# Altium PCB BLE_tag_hv1.PcbDoc
Units mm, origin at the board's own origin, x right, y up, seen from the top; angles counter-clockwise.
Board outline 48 x 58 mm, 2 copper layers (Top Layer, Bottom Layer); 40 components, 30 nets, 135 pads, 264 vias.
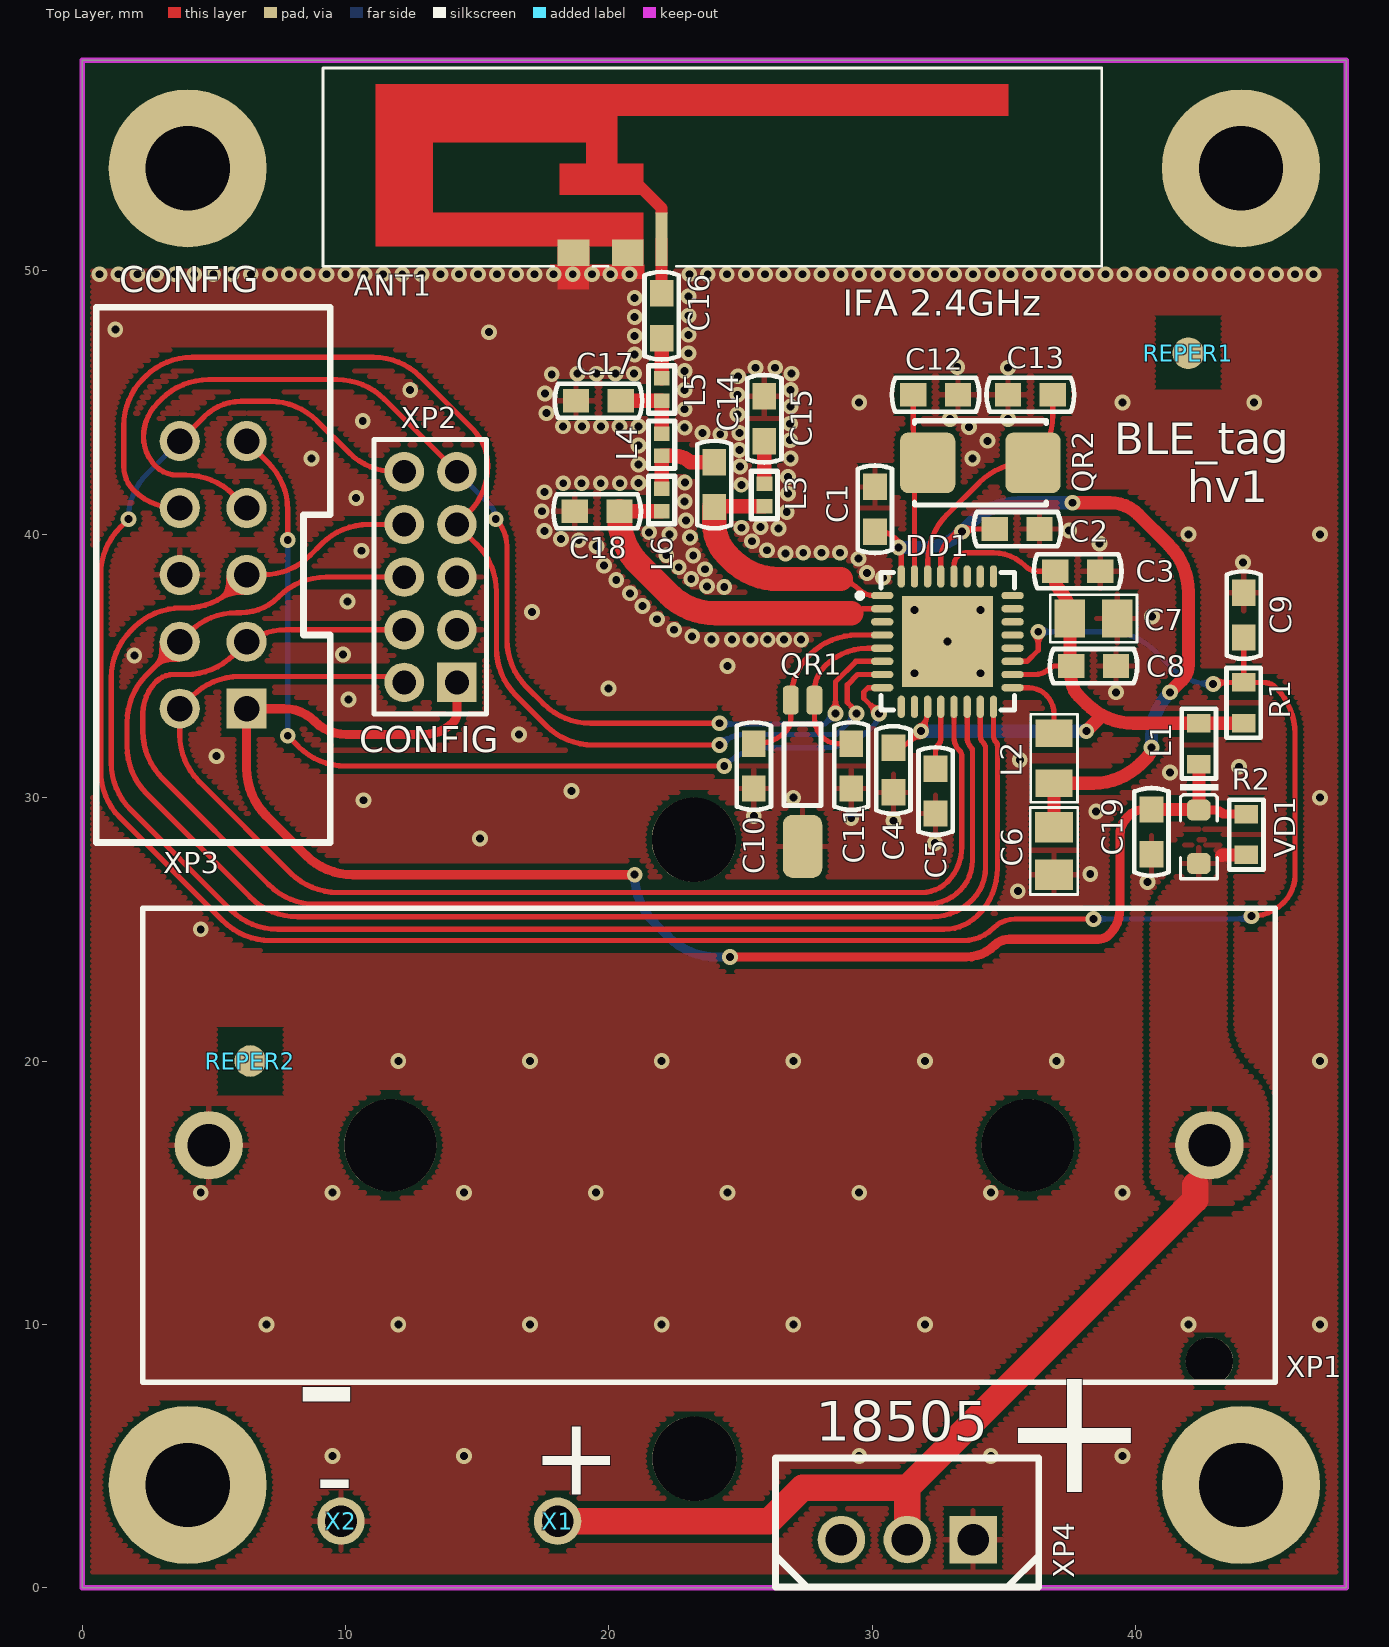
[diagram p0: Top Layer view]
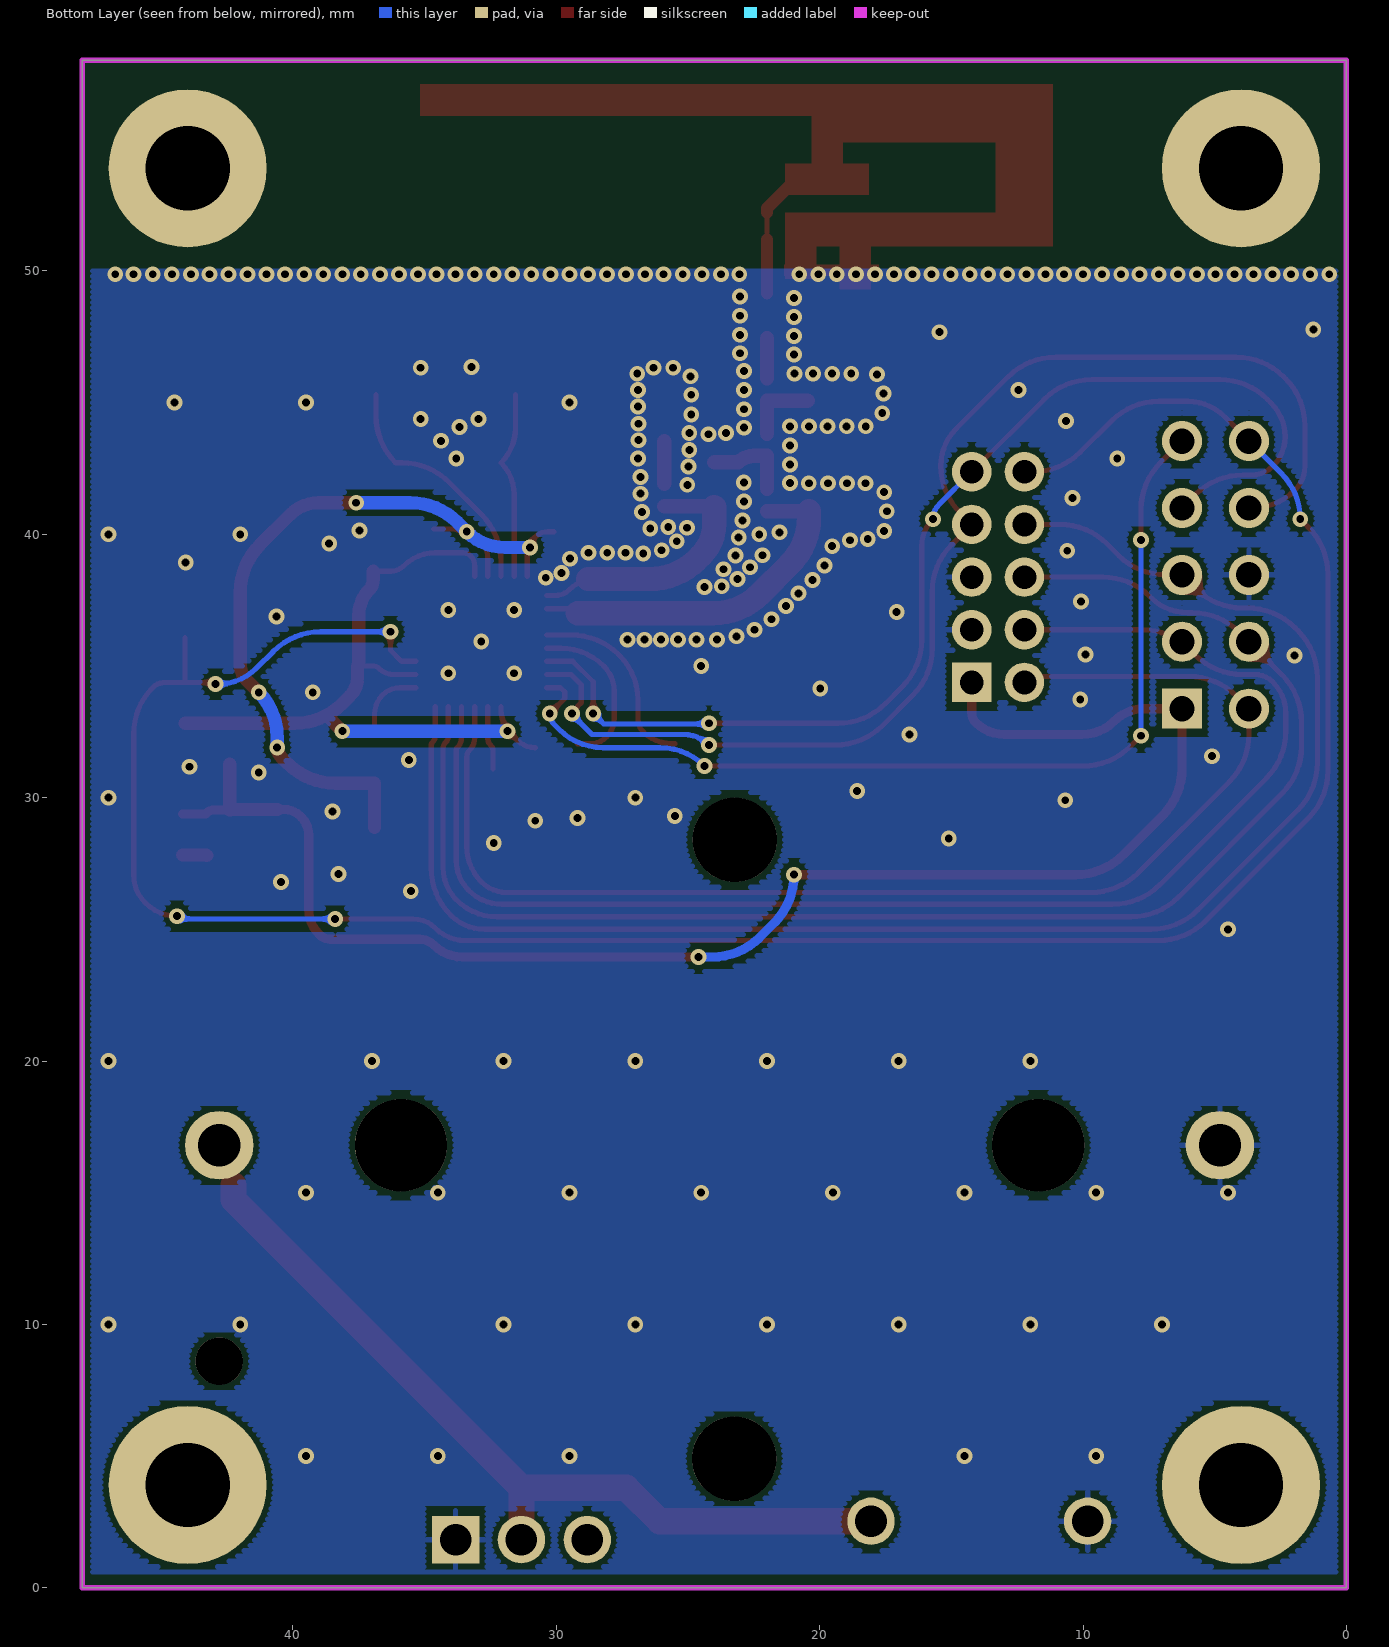
[diagram p1: Bottom Layer view, seen from below]
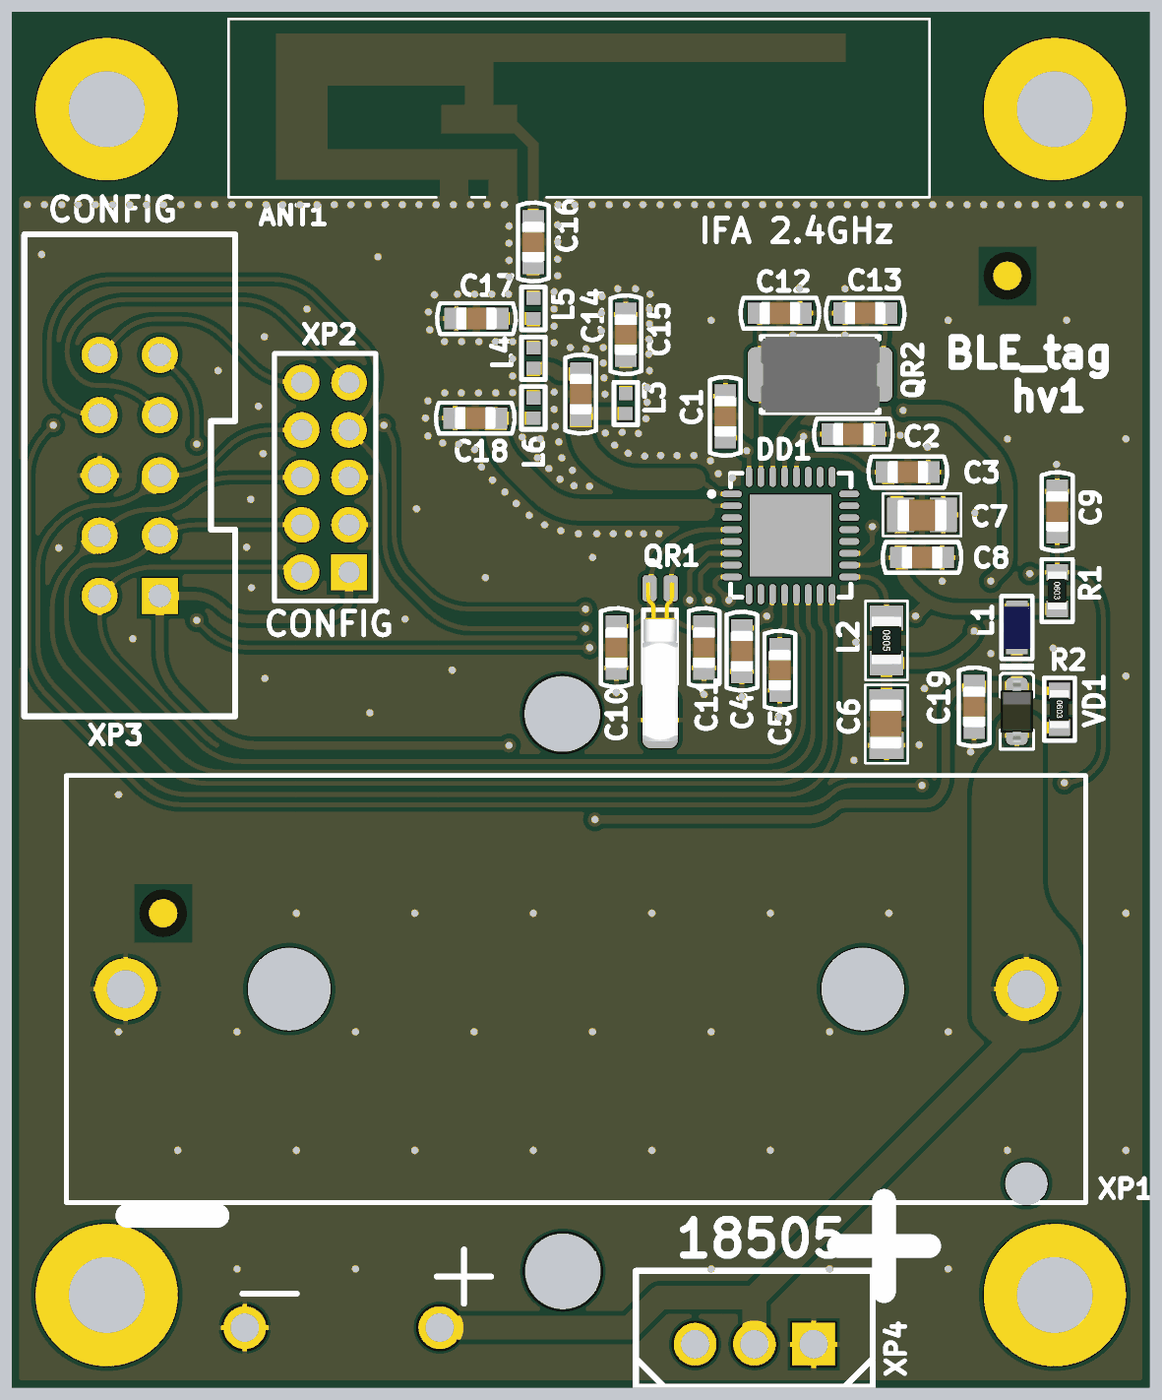
[diagram p2: 3D render of the assembled board from above, using the file's embedded part models]

## Layer stack, top to bottom
Top Solder: solder mask 0.0102, Solder Resist, Dk 3.5
Top Layer: signal copper 0.0356
Dielectric 1: dielectric 0.32, FR-4, Dk 4.8
Bottom Layer: signal copper 0.0356
Bottom Solder: solder mask 0.0102, Solder Resist, Dk 3.5

## Board outline
0,0 48,0 48,58 0,58

## Design rules (kind name [scope] priority, off if disabled: settings)
Clearance [All] p1: gap=0.2 ignorepadtopadclearanceinfootprint=FALSE
ComponentClearance [All] p1: gap=0.05 collisioncheckmode=3 verticalgap=2540 showdistances=FALSE
HoleSize [All] p1: absolutevalues=TRUE maxlimit=10 minlimit=0.025 maxpercent=80.000 minpercent=20.000
HoleToHoleClearance [All] p1: gap=0.05 allowstackedmicrovias=TRUE
MinimumSolderMaskSliver [All] p1: minsoldermaskwidth=0.05
PolygonConnect VIA [IsVia] p1: connectstyle=Direct reliefconductorwidth=0.254 reliefentries=4 polygonreliefangle="90 Angle" airgapwidth=0.254
PolygonConnect [All] p2: connectstyle=Relief reliefconductorwidth=0.2 reliefentries=4 polygonreliefangle="90 Angle" airgapwidth=0.2
RoutingVias [All] p1: holewidth=0.4 width=0.8 viastyle="Through Hole" minholewidth=0.3 minwidth=0.6 maxholewidth=0.5 maxwidth=1
ShortCircuit Antenna [InComponent('ANT1')] p1: allowed=TRUE
ShortCircuit [All] p2: allowed=FALSE
SilkToSilkClearance [All] p1: silktosilkclearance=0.05
SilkToSolderMaskClearance [IsPad] p1: minsilkscreentomaskgap=0.05 clearancetoexposedcopper=TRUE
SolderMaskExpansion [All] p1: expansion=0.102
Width [All] p1: maxlimit=3 minlimit=0.2 preferedwidth=0.5
23 further rules are at their usual default settings.

## Classes and differential pairs
component class [5]-CONNECTORS: C19 R2 VD1 X1 X2 XP1 XP2 XP3 XP4
component class [4]-RF: ANT1 C14 C15 C16 C17 C18 L3 L4 L5 L6 REPER1 REPER2
component class [3]-MCU: C1 C2 C3 C4 C5 C6 C7 C8 C9 C10 C11 C12 C13 DD1 L1 L2 QR1 QR2 R1

## Components (designator, comment, footprint, x,y, rotation, side; value= is the part's Value field where it differs from the comment)
ANT1 "IFA_TI_2.4G_Reference" ANT_IFA_2.4G_BEST 22.003,50.263 r0 top locked
C1 "0.1uF" CC0603 30.1,40.95 r90 top
C2 "0.1uF" CC0603 35.5,40.2 r0 top
C3 "0.1uF" CC0603 37.8,38.6 r180 top
C4 "0.1uF" CC0603 30.8,31.05 r90 top
C5 "1uF" CC0603 32.4,30.25 r270 top
C6 "10uF" CC0805 36.9,27.975 r90 top
C7 "10uF" CC0805 38.4,36.8 r180 top
C8 "0.1uF" CC0603 38.4,35 r180 top
C9 "0.1uF" CC0603 44.1,36.934 r270 top
C10 "15pF" CC0603 25.5,31.2 r270 top
C11 "15pF" CC0603 29.2,31.2 r270 top
C12 "22pF" CC0603 32.4,45.298 r0 top
C13 "22pF" CC0603 36,45.3 r180 top
C14 "1pF" CC0603 24,41.888 r90 top
C15 "6.8pF" CC0603 25.9,44.39 r270 top
C16 "12pF" CC0603 22,48.3 r90 top
C17 "1pF" CC0603 19.6,45.075 r180 top
C18 "1pF" CC0603 19.55,40.875 r180 top
C19 "0.1uF" CC0603 40.6,28.7 r90 top
DD1 "CC2650" QFN32_TI 30.375,37.675 r0 top
L1 "BLM18HE152SN1" L0603 42.4,32.05 r90 top
L2 "10uH" RC0805 36.9,31.5 r270 top
L3 "2.4nH" L0402 25.9,41.49 r270 top
L4 "2nH" L0402 22,43.4 r90 top
L5 "2nH" L0402 22,45.5 r90 top
L6 "2.4nH" L0402 22,41.3 r90 top
QR1 "MS3V-T1R" MS3V-T1R 27.8,33.7 r270 top
QR2 "SJK-6L-24.0" AC5032_2 34.1,42.715 r0 top
R1 "100k" RC0603#1 44.1,33.6 r270 top
R2 "n.p" RC0603#2 44.2,28.6 r270 top
REPER1 "REPER1.2" REPER1.2 42,46.875 r90 top
REPER2 "REPER1.2" REPER1.2 6.381,20 r90 top
VD1 "PMEG1020EJ" SOD323 42.4,28.516 r90 top
X1 "PIN_1.2mm" PIN_1.2mm 18.05,2.525 r0 top
X2 "PIN_1.2mm" PIN_1.2mm 9.825,2.525 r0 top
XP1 "BHC-CR123A" CR123_HOLDER 42.8,16.8 r180 top locked
XP2 "PLD2-10" PLD2-10 14.2,34.375 r180 top
XP3 "BH-10" BH-10 6.24,33.38 r90 top locked
XP4 "MW03D" MW03D 33.825,1.825 r180 top

## Footprints (in the part's own frame and the unit in brackets; to place one, negate y for a bottom-side part, rotate by r counter-clockwise, add the part's x,y. Pads: shape width x height; smd on the part's side, far side on the other; paste and mask are expansions set on the pad)
AC5032_2 [mm]
  rrect30% 2.1x2.3 smd mask+0.05: 1(-2,0) 2(2,0)
  silkscreen extent -2.5,-1.6 2.5,1.6, body extent -2.5,-1.6 2.5,1.6, height 1.2
ANT_IFA_2.4G_BEST [mm]
  rect 0.46x2.03 smd paste-5 mask+0.05: 1(-0.003,0.937)
  rect 1.2x1 smd paste-5 mask+0.05: 2(-3.35,0.43) 2(-1.285,0.423)
  Top Layer region: -2.883,3.7 -1.684,3.7 -1.684,4.7 -2.883,4.7
  Top Layer region: -10.864,5.623 13.172,5.623 13.172,6.832 -10.864,6.832
  Top Layer region: -10.864,0.662 -8.683,0.662 -8.683,6.832 -10.864,6.832
  Top Layer region: -3.949,-0.078 -2.749,-0.078 -2.749,1.952 -3.949,1.952
  Top Layer region: -1.884,-0.078 -0.684,-0.078 -0.684,1.952 -1.884,1.952
  Top Layer region: -10.864,0.662 -0.684,0.662 -0.684,1.952 -10.864,1.952
  Top Layer region: -8.8,4.624 -1.684,4.624 -1.684,5.8 -8.8,5.8
  Top Layer region: -3.883,2.615 -0.683,2.615 -0.683,3.825 -3.883,3.825
  Top Layer pour cut-out: -12.914,7.493 -12.914,-0.132 16.769,-0.132 16.769,7.493
  Top Layer lines w0.2: -0.003,1.2 -0.003,2.118
  Top Layer lines w0.46: -0.931,3.046 -0.003,2.118 -0.003,1.952
  Bottom Layer pour cut-out: -12.914,7.493 -12.914,-0.132 16.769,-0.132 16.769,7.493
  silkscreen extent -12.86,-0.08 16.72,7.44
BH-10 [mil] "Connector; Header; 5x2 Position"
  rect 60x60 hole 38 mask+1.97: 1(0,0)
  round 60 hole 38 mask+1.97: 2(0,100) 3(100,0) 4(100,100) 5(200,0) 6(200,100) 7(300,0) 8(300,100) 9(400,0) 10(400,100)
  silkscreen extent -200,-125 600,225
CC0603 [mm]
  rect 1x0.9 smd paste-25.4 mask+0.05: 1(-0.85,0) 2(0.85,0)
  silkscreen extent -1.66,-0.65 1.66,0.65, body extent -0.87,-0.47 0.88,0.48, height 0.85
CC0805 [mm]
  rect 1.15x1.45 smd paste-25.4 mask+0.05: 1(-0.9,0) 2(0.9,0)
  silkscreen extent -1.65,-0.9 1.65,0.9, body extent -1.05,-0.65 1.05,0.7, height 1.1
CR123_HOLDER [mm]
  round 1.8 hole 1.8 unplated mask+0.05: 0(0,8.2)
  round 3.5 hole 3.5 unplated mask+0.05: 0(6.9,0) 0(31.1,0)
  round 2.6 hole 1.6 mask+0.05: 1(0,0) 2(38,0)
  silkscreen extent -2.5,-9 40.5,9, body extent -2.5,-9 40.5,9, height 14
L0402 [mm]
  rect 0.55x0.6 smd mask+0.05: 1(-0.425,0) 2(0.425,0)
  silkscreen extent -0.9,-0.5 0.9,0.5
L0603 [mm]
  rect 0.7x0.9 smd paste-25.4 mask+0.05: 1(-0.775,0) 2(0.774,0)
  silkscreen extent -1.32,-0.65 1.33,0.65, body extent -0.9,-0.58 0.9,0.54, height 1
MS3V-T1R [mm]
  rrect50% 1.1x0.6 smd mask+0.05: 1(0,0) 2(0,-0.9)
  rrect50% 2.4x1.5 smd mask+0.05: 3(5.55,-0.45)
  silkscreen extent 0.9,-1.15 4,0.25, body extent -0.25,-1.19 6.45,0.29, height 1.48
MW03D [mm]
  rect 1.8x1.8 hole 1.2: 1(0,0)
  round 1.8 hole 1.2: 2(2.5,0) 3(5,0)
  silkscreen extent -2.5,-3.1 7.5,1.8
PIN_1.2mm [mm]
  round 1.8 hole 1.2: 1(0,0)
PLD2-10 [mm]
  rect 1.5x1.5 hole 0.9 mask+0.05: 1(-0.025,0)
  round 1.5 hole 0.9 mask+0.05: 2(1.975,0) 3(-0.025,-2) 4(1.975,-2) 5(-0.025,-4) 6(1.975,-4) 7(-0.025,-6) 8(1.975,-6) 9(-0.025,-8) 10(1.975,-8)
  silkscreen extent -1.15,-9.23 3.13,1.2
QFN32_TI [mm]
  oval 0.85x0.28 smd mask+0.05: 1(0,0) 2(0,-0.5) 3(0,-1) 4(0,-1.5) 5(0,-2) 6(0,-2.5) 7(0,-3) 8(0,-3.5) 17(4.95,-3.5) 18(4.95,-3) 19(4.95,-2.5) 20(4.95,-2) 21(4.95,-1.5) 22(4.95,-1) 23(4.95,-0.5) 24(4.95,0)
  oval 0.28x0.85 smd mask+0.05: 9(0.725,-4.225) 10(1.225,-4.225) 11(1.725,-4.225) 12(2.225,-4.225) 13(2.725,-4.225) 14(3.225,-4.225) 15(3.725,-4.225) 16(4.225,-4.225) 25(4.225,0.725) 26(3.725,0.725) 27(3.225,0.725) 28(2.725,0.725) 29(2.225,0.725) 30(1.725,0.725) 31(1.225,0.725) 32(0.725,0.725)
  rect 3.45x3.45 smd mask+0.05: 33(2.475,-1.75)
  silkscreen extent -0.95,-4.35 5.02,0.87
RC0603#1 [mm]
  rect 0.7x0.9 smd paste-25.4 mask+0.05: 1(-0.775,0) 2(0.774,0)
  silkscreen extent -1.32,-0.65 1.33,0.65, body extent -0.8,-0.4 0.8,0.4, height 0.45
RC0603#2 [mm]
  rect 0.7x0.9 smd paste-25.4: 1(-0.775,0) 2(0.774,0)
  silkscreen extent -1.32,-0.65 1.33,0.65, body extent -0.8,-0.4 0.8,0.4, height 0.45
RC0805 [mm]
  rect 1.05x1.4 smd paste-25.4 mask+0.05: 1(-0.95,0) 2(0.95,0)
  silkscreen extent -1.67,-0.89 1.67,0.89, body extent -1,-0.62 1,0.63, height 0.6
REPER1.2 [mm]
  round 1.2 smd paste-25.4 mask+0.05: 1(0,0)
  Top Layer pour cut-out: -1.35,-1.325 1.325,-1.325 1.325,1.325 -1.35,1.325
SOD323 [mm]
  rrect50% 0.8x0.9 smd mask+0.05: 1(-1.016,0) 2(1.016,0)
  silkscreen extent -1.6,-0.74 2,0.72, body extent -1.3,-0.67 1.3,0.67, height 1.1

## Part data
ANT1: library part ANT_WiFi_IFA_BEST
C1 C2 C3 C4 C5 C8 C9 C10 C11 C12 C13 C14 C15 C16 C17 C18 C19: library part CC0603, "CC0603"
C6 C7: library part CC0805, "CC0805"
DD1: library part CC2650RHB, "CC2650RHBT"
L1: library part L0603, "L0603"
L2: library part L0805, "L0805"
L3 L4 L5 L6: library part L0402, "L0402"
QR1: "CRYSTAL_32768 Hz"
QR2: library part AC5032_2, "AC5032/2"
R1 R2: library part RC0603, "RC0603"
VD1: library part PMEG2010
XP1: "Holder for CR123 battery"

## Free pads (board coordinates)
  round 6 hole 3.2 mask+0.05: 0(4,3.9) 0(4,53.9) 0(44,3.9) 0(44,53.9)
  round 3.2 hole 3.2 unplated: 0(23.225,28.4) 0(23.246,4.9)

## Via types
v1: diameter 0.6, hole 0.3, Top Layer to Bottom Layer, tented both sides, 264 vias

## Nets (pads, with @x,y where several pads share a name; then routed paths per layer and width w, separated by ;. In a path a pad name is that pad's centre, name@x,y a point inside that pad or via, vN(x,y) a via of type N, cw(c..) or ccw(c..) an arc to the next point about the centre after c; other vN are vias at no path point)
+3V: C19.2 L1.1 R2.1 VD1.2 XP2.1 XP3.1 | length 59.8
  Top Layer w0.35: XP2.1 14.225,33.212 cw(c13.713,33.212) 14.075,32.85 cw(c12.989,33.936) 12.989,32.4 10.032,32.4 cw(c10.032,34.107) 8.825,32.9 ccw(c7.666,31.741) 7.666,33.38 XP3.1 6.24,31.112 ccw(c8.78,31.112) 6.984,29.316 8.481,27.819 ccw(c10.277,29.615) 10.277,27.075 v1(20.975,27.075) ; v1(24.6,23.95) 33.566,23.95 ccw(c33.566,25.48) 34.648,24.398 cw(c35.196,23.851) 35.196,24.625 38.578,24.625 ccw(c38.578,25.222) 39,24.8 ccw(c38.034,25.766) 39.4,25.766 39.4,28.576 cw(c40.364,28.576) 39.682,29.257 39.725,29.3 cw(c40.329,28.696) 40.329,29.55 C19.2 ; VD1.2 42.981,29.532 cw(c42.981,29.081) 43.3,29.4 ccw(c43.36,29.46) 43.36,29.375 R2.1
  Top Layer w0.5: C19.2 42.356,29.55 cw(c42.356,29.489) VD1.2 ; VD1.2 L1.1
  Bottom Layer w0.35: v1(20.975,27.075) 20.975,27.052 ccw(c23.515,27.052) 21.719,25.256 22.281,24.694 ccw(c24.077,26.49) 24.077,23.95 v1(24.6,23.95)
+3V_F: C3.2 C4.2 C7.2 C8.2 DD1.11 DD1.18 DD1.28 L1.2 R1.2 | length 28
  Top Layer w0.2: C4.2 ccw(c30.8,32.866) 31.483,32.183 31.7,32.4 ccw(c30.734,33.366) 32.1,33.366 DD1.11 ; DD1.28 33.1,38.814 cw(c33.612,38.814) 33.25,39.176 cw(c33.55,38.876) 33.55,39.3 34.593,39.3 cw(c34.593,37.593) 35.8,38.8 ccw(c36.283,39.283) 36.283,38.6 C3.2 ; DD1.18 36.176,34.675 ccw(c36.176,35.443) 36.719,34.9 cw(c36.96,34.659) 36.96,35 C8.2
  Top Layer w0.5: C3.2 36.95,38.262 ccw(c37.462,38.262) 37.1,37.9 cw(c36.134,36.934) 37.5,36.934 C7.2 37.5,35.121 ccw(c37.671,35.121) C8.2 37.55,34.545 ccw(c38.504,34.545) 37.829,33.871 38.132,33.568 ccw(c39.928,35.364) 38.726,33.127 ccw(c39.928,35.364) 39.928,32.824 L1.2 44.099,32.824 R1.2 ; v1(38.125,32.525) 38.726,33.126
  Bottom Layer w0.5: v1(31.851,32.525) v1(38.125,32.525)
BT_MRDO: DD1.8 XP3.9 | length 37.4
  Top Layer w0.2: XP3.9 7.056,42.724 cw(c5.26,40.928) 7.8,40.928 v1(7.8,39.779) ; v1(7.8,32.35) 8.206,31.944 ccw(c10.002,33.74) 10.002,31.2 v1(24.375,31.2) ; v1(30.249,33.2) 29.675,33.774 29.675,34.009 29.841,34.175 DD1.8
  Bottom Layer w0.2: v1(7.8,32.35) v1(7.8,39.779) ; v1(24.375,31.2) cw(c26.065,29.51) 26.065,31.9 28.225,31.9 ccw(c28.225,34.254) 29.889,32.589 30.071,32.771 ccw(c29.641,33.2) v1(30.249,33.2) ; v1(7.8,39.779) cw(c7.971,39.779) 7.85,39.9 7.8,39.85 v1(7.8,39.779)
BT_RX: DD1.7 XP2.7 XP3.8 | length 48.4
  Top Layer w0.2: XP3.8 3.58,41 cw(c3.58,43.305) 1.95,41.675 cw(c2.855,42.58) 1.575,42.58 1.575,44.123 cw(c4.115,44.123) 2.319,45.919 2.381,45.981 cw(c4.177,44.185) 4.177,46.725 11.048,46.725 cw(c11.048,44.185) 12.844,45.981 14.817,44.008 cw(c13.408,42.6) 15.4,42.6 cw(c12.865,42.6) 14.658,40.808 XP2.7 14.981,39.619 cw(c13.185,37.823) 15.725,37.823 15.725,35.677 ccw(c18.265,35.677) 16.469,33.881 17.606,32.744 ccw(c19.402,34.54) 19.402,32 v1(24.2,32) ; v1(29.4,33.2) 29.447,33.2 29.2,33.447 29.2,33.47 29.05,33.62 29.05,34.284 29.441,34.675 DD1.7
  Bottom Layer w0.2: v1(24.2,32) cw(c25.166,31.034) 25.166,32.4 28.649,32.4 29.4,33.151 v1(29.4,33.2)
BT_TX: DD1.6 XP2.9 XP3.7 | length 44.9
  Top Layer w0.2: XP3.7 5.734,41.506 ccw(c3.938,39.71) 3.938,42.25 3.606,42.25 cw(c3.606,43.412) 2.785,42.59 cw(c3.894,43.7) 2.325,43.7 cw(c4.136,43.7) 2.855,44.98 3.006,45.131 cw(c4.802,43.335) 4.802,45.875 9.673,45.875 cw(c9.673,43.335) 11.469,45.131 XP2.9 ; v1(15.7,40.575) cw(c14.674,39.549) 16.125,39.549 16.125,36.002 ccw(c18.665,36.002) 16.869,34.206 17.507,33.568 ccw(c19.303,35.364) 19.303,32.824 v1(24.2,32.824) ; v1(28.6,33.2) 28.6,34.4 29.375,35.175 DD1.6
  Bottom Layer w0.2: XP3.7@5.834,41.406 XP3.7 ; XP2.9 15.47,41.13 cw(c14.915,40.575) v1(15.7,40.575) ; v1@24.2,32.8 28.2,32.8 v1(28.6,33.2)
GND: ANT1.2 C1.2 C2.2 C3.1 C4.1 C5.2 C6.1 C7.1 C8.1 C9.1 C10.2 C11.2 C12.2 C13.2 C15.1 C17.2 C18.2 C19.1 DD1.33 QR1.3 X2.1 XP1.2 XP2.3 XP2.5 XP3.6 XP4.1
  other v1: 9.5,5 14.5,5 29.5,5 34.5,5 39.5,5 7,10 12,10 17,10 22,10 27,10 32,10 42,10 47,10 4.5,15 9.5,15 14.5,15 19.5,15 24.5,15 29.5,15 34.5,15 39.5,15 12,20 17,20 22,20 27,20 32,20 37,20 47,20 4.5,25 35.525,26.45 40.45,26.8 38.275,27.1 32.375,28.275 15.1,28.45 30.8,29.125 29.2,29.225 25.5,29.3 38.5,29.475 10.675,29.9 27,30 47,30 18.575,30.25 41.3,30.95 43.925,31.175 35.6,31.425 5.1,31.575 16.584,32.4 10.106,33.725 39.25,34 19.977,34.15 31.6,34.725 34.1,34.725 24.5,35 1.975,35.4 9.9,35.431 32.85,35.925 23.9,36 24.675,36 25.375,36 26.025,36 26.65,36 27.298,36 23.16,36.127 22.475,36.375 21.825,36.775 40.625,36.875 17.075,37.05 31.6,37.125 34.1,37.125 21.275,37.275 10.075,37.45 20.8,37.76 24.375,38 23.716,38.025 20.277,38.262 23.125,38.3 30.4,38.35 29.8,38.532 23.65,38.675 22.65,38.75 19.812,38.814 44.075,38.925 29.475,39.075 22.175,39.207 23.2,39.2 26.7,39.275 27.375,39.3 28.064,39.3 28.775,39.3 10.6,39.375 26,39.393 19.525,39.55 38.625,39.65 25.425,39.737 18.85,39.775 18.175,39.825 23.075,39.875 22.293,40 42,40 47,40 21.525,40.075 17.55,40.125 37.475,40.15 26.433,40.225 25.037,40.25 25.75,40.277 22.925,40.525 26.75,40.85 17.45,40.875 22.875,41.25 10.4,41.375 26.8,41.544 17.55,41.6 25.025,41.88 18.262,41.938 18.962,41.938 19.687,41.938 20.412,41.938 21.125,41.95 22.881,41.971 26.8,42.175 24.98,42.575 21.125,42.65 8.7,42.875 26.9,42.875 33.8,42.875 24.95,43.2 21.125,43.375 34.375,43.55 26.875,43.575 24.225,43.8 23.556,43.85 24.95,43.85 22.875,44.05 33.675,44.075 18.25,44.1 18.975,44.1 19.7,44.1 20.4,44.1 21.125,44.1 26.875,44.2 10.65,44.306 32.95,44.375 35.15,44.375 24.875,44.55 17.625,44.6 22.875,44.75 26.9,44.85 29.5,45 39.5,45 44.5,45 24.875,45.3 17.575,45.35 12.45,45.475 22.875,45.475 26.9,45.475 24.9,46 17.825,46.075 18.8,46.1 19.525,46.1 20.25,46.1 20.95,46.1 26.925,46.1 22.875,46.2 25.562,46.325 26.311,46.325 35.15,46.325 33.225,46.35 20.975,46.825 23.025,46.875 20.975,47.525 23.025,47.575 15.444,47.675 1.254,47.775 20.975,48.25 23.025,48.3 20.975,48.975 23.025,49.025 0.65,49.875 1.375,49.875 2.1,49.875 2.8,49.875 3.525,49.875 4.25,49.875 4.975,49.875 5.675,49.875 6.4,49.875 7.125,49.875 7.85,49.875 8.55,49.875 9.275,49.875 10,49.875 10.725,49.875 11.425,49.875 12.15,49.875 12.875,49.875 13.6,49.875 14.3,49.875 15.025,49.875 15.75,49.875 16.475,49.875 17.175,49.875 17.9,49.875 18.625,49.875 19.35,49.875 20.05,49.875 20.775,49.875 23.05,49.875 23.75,49.875 24.475,49.875 25.2,49.875 25.925,49.875 26.625,49.875 27.35,49.875 28.075,49.875 28.8,49.875 29.5,49.875 30.225,49.875 30.95,49.875 31.675,49.875 32.375,49.875 33.1,49.875 33.825,49.875 34.55,49.875 35.25,49.875 35.975,49.875 36.7,49.875 37.425,49.875 38.125,49.875 38.85,49.875 39.575,49.875 40.3,49.875 41,49.875 41.725,49.875 42.45,49.875 43.175,49.875 43.875,49.875 44.6,49.875 45.325,49.875 46.05,49.875 46.75,49.875
JTAG_TCK: DD1.14 XP2.4 XP3.3 | length 54
  Top Layer w0.2: XP3.3 XP3.3@5.855,35.535 ; XP2.4 7.747,36.375 ccw(c7.747,33.835) 5.951,35.631 XP3.3@5.855,35.535 ; DD1.14 33.6,32.279 ccw(c34.136,32.279) 33.757,31.9 cw(c33.653,31.796) 33.8,31.796 33.8,27.622 cw(c32.178,27.622) 33.325,26.475 cw(c32.058,27.742) 32.058,25.95 8.877,25.95 cw(c8.877,28.49) 7.081,26.694 3.044,30.731 cw(c4.84,32.527) 2.3,32.527 2.3,33.193 cw(c4.007,33.193) 2.8,34.4 cw(c3.464,33.736) 3.464,34.675 3.943,34.675 ccw(c3.943,37.215) 5.739,35.419 XP3.3@5.855,35.535
JTAG_TDI: DD1.16 XP2.8 XP3.5 | length 61.1
  Top Layer w0.2: XP2.8 10.877,40.375 ccw(c10.877,37.835) 9.081,39.631 8.654,39.204 cw(c6.858,41) 6.858,38.46 XP3.5 5.724,37.944 cw(c3.928,39.74) 3.928,37.2 3.752,37.2 ccw(c3.752,34.66) 1.956,36.456 1.844,36.344 ccw(c3.64,34.548) 1.1,34.548 1.1,31.327 ccw(c3.64,31.327) 1.844,29.531 5.631,25.744 ccw(c7.427,27.54) 7.427,25 32.725,25 ccw(c32.725,26.812) 34.006,25.531 ccw(c32.21,27.327) 34.75,27.327 34.75,31.988 ccw(c34.588,31.988) 34.702,32.102 cw(c34.95,32.35) 34.6,32.35 DD1.16
JTAG_TDO: DD1.15 XP2.6 XP3.4 | length 56.8
  Top Layer w0.2: XP2.6 9.252,38.375 ccw(c9.252,35.835) 7.456,37.631 7.433,37.608 cw(c6.025,39.017) 6.025,37.025 5.857,37.025 ccw(c5.857,34.485) 4.061,36.281 XP3.4 2.444,34.664 ccw(c4.24,32.868) 1.7,32.868 1.7,31.952 ccw(c4.24,31.952) 2.444,30.156 6.381,26.219 ccw(c8.177,28.015) 8.177,25.475 32.251,25.475 ccw(c32.251,27.646) 33.786,26.111 ccw(c32.545,27.352) 34.3,27.352 34.3,31.859 ccw(c33.959,31.859) 34.2,32.1 cw(c34.441,32.341) 34.1,32.341 DD1.15
JTAG_TMS: DD1.13 XP2.2 XP3.2 | length 49
  Top Layer w0.2: XP2.2 ccw(c11.682,33.832) 11.682,34.6 5.972,34.6 ccw(c5.972,32.06) 4.176,33.856 XP3.2 3.7,32.402 ccw(c6.24,32.402) 4.444,30.606 7.906,27.144 ccw(c9.702,28.94) 9.702,26.4 31.878,26.4 ccw(c31.878,27.766) 32.844,26.8 ccw(c31.502,28.142) 33.4,28.142 33.4,31.559 ccw(c33.059,31.559) 33.3,31.8 cw(c33.783,32.283) 33.1,32.283 DD1.13
MISO: DD1.25
MOSI: DD1.24
NetANT1_1: ANT1.1 C16.2 | length 2.1
  Top Layer w0.45: C16.2 ANT1.1
NetC1_1: C1.1 C2.1 C6.2 DD1.29 DD1.32 L2.2 | length 31.3
  Top Layer w0.2: C1.1 30.317,40.1 cw(c30.317,39.417) 30.8,39.9 cw(c30.076,39.176) 31.1,39.176 DD1.32 ; DD1.29 32.6,39.076 cw(c33.624,39.076) 32.9,39.8 cw(c33.866,38.834) 33.866,40.2 C2.1
  Top Layer w0.5: C6.2 L2.2 38.398,30.55 ccw(c38.398,33.09) 40.194,31.294 40.459,31.559 ccw(c40.117,31.9) v1(40.6,31.9) ; v1(37.6,41.2) 39.018,41.2 cw(c39.018,39.67) 40.1,40.752 41.256,39.596 cw(c39.46,37.8) 42,37.8 42,35.052 cw(c41.15,35.052) 41.751,34.451 v1(41.3,34)
  Bottom Layer w0.5: v1(31,39.5) 31.951,39.5 ccw(c31.951,41.549) v1(33.4,40.1) 33.756,40.456 cw(c35.552,38.66) 35.552,41.2 v1(37.6,41.2) ; v1(40.6,31.9) 40.6,32.31 cw(c42.99,32.31) v1(41.3,34)
NetC5_1: C5.1 DD1.12 | length 2.4
  Top Layer w0.2: C5.1 32.4,31.759 cw(c32.741,31.759) 32.5,32 ccw(c32.259,32.241) 32.6,32.241 DD1.12
NetC12_1: C12.1 DD1.31 QR2.1 | length 7.2
  Top Layer w0.2: C12.1 31.55,44.043 ccw(c33.428,44.043) QR2.1 ccw(c33.307,41.508) 31.6,41.508 DD1.31
NetC13_1: C13.1 DD1.30 QR2.2 | length 9.3
  Top Layer w0.2: DD1.30 32.1,38.956 cw(c34.64,38.956) 32.844,40.752 34.063,41.971 cw(c35.859,40.175) 35.859,42.715 QR2.2 36.106,42.721 ccw(c34.31,44.517) 36.85,44.517 C13.1
NetC14_2: C14.2 L4.1 L6.2 | length 3.3
  Top Layer w0.55: L6.2 L4.1 22.519,42.975 cw(c22.519,42.165) 23.092,42.738 C14.2
NetC15_2: C15.2 L3.1 | length 1.6
  Top Layer w0.55: L3.1 C15.2
NetC16_1: C16.1 L5.2 | length 1.5
  Top Layer w0.55: L5.2 C16.1
NetC17_1: C17.1 L4.2 L5.1 | length 2.8
  Top Layer w0.55: C17.1 L5.1 L4.2
NetDD1_17: DD1.17 L2.1 | length 2.9
  Top Layer w0.2: DD1.17 35.936,34.175 cw(c35.936,33.236) 36.6,33.9 cw(c35.876,33.176) 36.9,33.176 L2.1
NetR2_2: R2.2 VD1.1 X1.1 XP1.1 XP4.2 | length 32.7
  Top Layer w0.5: 43.27,27.8 cw(c43.332,27.738) 43.332,27.826 R2.2
  Top Layer w1: X1.1 26.076,2.525 27.351,3.8 31.325,3.8 ; XP4.2 31.325,3.8 ; 42.261,15.294 42.261,14.736 31.325,3.8
RESET: C9.2 DD1.19 R1.1 XP2.10 XP3.10 | length 93.9
  Top Layer w0.2: v1(1.75,40.575) 1.444,40.269 ccw(c3.24,38.473) 0.7,38.473 0.7,31.021 ccw(c3.24,31.021) 1.444,29.225 5.35,25.319 ccw(c7.146,27.115) 7.146,24.575 33.453,24.575 ccw(c33.453,26.197) 34.6,25.05 cw(c35.422,24.228) 35.422,25.39 v1(38.398,25.39) ; XP3.10 4.634,44.474 cw(c6.025,43.082) 6.025,45.05 7.123,45.05 cw(c7.123,42.51) 8.919,44.306 10.106,43.119 ccw(c11.902,44.915) 11.902,42.375 XP2.10 ; DD1.19 35.875,35.175 36.3,35.6 v1(36.3,36.3) v1@36.1,36.3 ; v1(42.943,34.318) cw(c43.081,34.179) 43.081,34.375 R1.1 ; C9.2 R1.1 ; v1@44.456,25.556 v1(44.4,25.5) ccw(c44.4,27.19) 45.595,25.995 45.625,26.025 ccw(c44.599,27.051) 46.05,27.051 46.05,32.429 ccw(c43.575,32.429) 45.325,34.179 ccw(c44.853,33.707) 44.853,34.375 R1.1
  Bottom Layer w0.2: v1(1.75,40.575) cw(c4.2,40.575) 2.468,42.308 XP3.10 ; v1(36.3,36.3) 38.948,36.3 cw(c38.948,33.76) 40.744,35.556 41.364,34.936 ccw(c42.9,36.473) 42.9,34.3 ccw(c42.9,34.36) v1(42.943,34.318) ; v1(38.398,25.39) 44.29,25.39 v1(44.4,25.5)
RF_N: C18.1 DD1.2 L6.1 | length 13.8
  Top Layer w0.2: 29.2,37 cw(c29.622,36.578) 29.622,37.175 DD1.2
  Top Layer w0.55: C18.1 L6.1
  Top Layer w0.92: C18.1 20.4,40.652 ccw(c22.94,40.652) 21.144,38.856 22.256,37.744 ccw(c24.052,39.54) 24.052,37 29.2,37
RF_P: C14.1 DD1.1 L3.2 | length 10.7
  Top Layer w0.2: 28.8,38.3 28.534,38.3 cw(c28.534,36.934) 29.5,37.9 ccw(c30.043,38.443) 30.043,37.675 DD1.1
  Top Layer w0.55: C14.1 cw(c24.066,40.972) 24.066,41.065 L3.2
  Top Layer w0.92: C14.1 24,40.407 ccw(c25.707,40.407) 24.5,39.2 24.656,39.044 ccw(c26.452,40.84) 26.452,38.3 28.8,38.3
SCK: DD1.23
SS0: DD1.22
X32K_Q1: C10.1 DD1.4 QR1.2 | length 7.4
  Top Layer w0.2: C10.1 25.614,32.05 ccw(c25.614,33.586) 26.7,32.5 ccw(c26.217,32.983) 26.9,32.983 QR1.2 cw(c29.314,33.7) 27.607,35.407 27.631,35.431 cw(c29.427,33.635) 29.427,36.175 DD1.4
X32K_Q2: C11.1 DD1.5 QR1.1 | length 6.4
  Top Layer w0.2: C11.1 28.704,32.05 cw(c28.704,32.904) 28.1,32.3 cw(c28.824,33.024) 27.8,33.024 QR1.1 27.8,34.034 cw(c29.166,34.034) 28.2,35 cw(c29.83,33.37) 29.83,35.675 DD1.5
pads on no net: DD1.3 DD1.9 DD1.10 DD1.20 DD1.21 DD1.26 DD1.27 REPER1.1 REPER2.1 XP1.0 XP4.3

## Polygon pours and split planes (outlines as drawn)
GND on Top Layer "GND_L01_P002" (hatched Horizontal grid 0.2 track 0.2, remove dead copper, pour order 2): 0,58 48,58 48,0 0,0
NetR2_2 on Top Layer "NETR2_2_L01_P000" (hatched Horizontal grid 0.2 track 0.2, remove dead copper, pour order 0): 40.6,24.948 cw(c43.14,24.948) 41.344,26.744 41.4,26.8 ccw(c40.917,27.283) 41.6,27.283 41.6,27.66 cw(c42.283,27.66) 41.8,28.142 cw(c42.422,27.521) 42.422,28.4 42.6,28.4 cw(c42.6,27.434) 43.283,28.117 43.3,28.1 cw(c43.059,27.859) 43.4,27.859 43.4,21.452 ccw(c45.94,21.452) 44.144,19.656 44.4,19.4 cw(c42.951,17.951) 45,17.951 45,16.549 cw(c42.951,16.549) 44.4,15.1 cw(c42.71,16.79) 42.71,14.4 42.356,14.4 cw(c42.356,16.226) 41.065,14.935 40.8,15.2 cw(c41.283,15.683) 40.6,15.683
GND on Bottom Layer "GND_L02_P004" (hatched Horizontal grid 0.2 track 0.2, remove dead copper, pour order 4): 0,58 48,58 48,0 0,0

## Keep-outs
Keep-Out Layer:
  the board outline again, w0.2

## Other copper
Top Layer:
  rectangle net GND: 20.125,49.7 21.319,50.6
  rectangle net GND: 17.753,49.8 21.35,50.25
  rectangle net GND: 18.054,49.3 19.25,50.775
  pour cut-out: 9.089,50.131 9.083,50.125 0,50.125 0,58 48,58 48,50.15
Bottom Layer:
  pour cut-out: 9.089,50.131 9.083,50.125 0,50.125 0,58 48,58 48,50.15

## Silkscreen, mask and mechanical layers (free items; w line width, h text height)
Top Overlay:
  text "CONFIG" at 1.4,49.2 h1
  text "BLE_tag" at 39.181,43.05 h1.2
  text "hv1" at 41.956,41.225 h1.2
  text "CONFIG" at 10.525,31.725 h1
  text "18505" at 27.85,5.575 h1.5
  text "+" at 17.05,3.525 h3
  text "-" at 8.85,2.8 h3

## Text inside footprints (layer, text, board x,y; h text height)
ANT1: Top Overlay "IFA 2.4GHz" at 28.875,48.3 h1
XP1: Top Overlay "+" at 40.55,7.925 h5 r180; Top Overlay "-" at 10.525,9.2 h5 r180